# Altium PCB mom-s.PcbDoc (part 2 of 2)
Units mm, origin at the board's own origin, x right, y up, seen from the top; angles counter-clockwise.
Board outline 16 x 18 mm, 4 copper layers (Top Layer, GND, PWR, Bottom Layer), stack 0.774 mm thick; 61 components, 60 nets, 227 pads, 0 vias.
Unrouted connection lines stored in the file: 160.
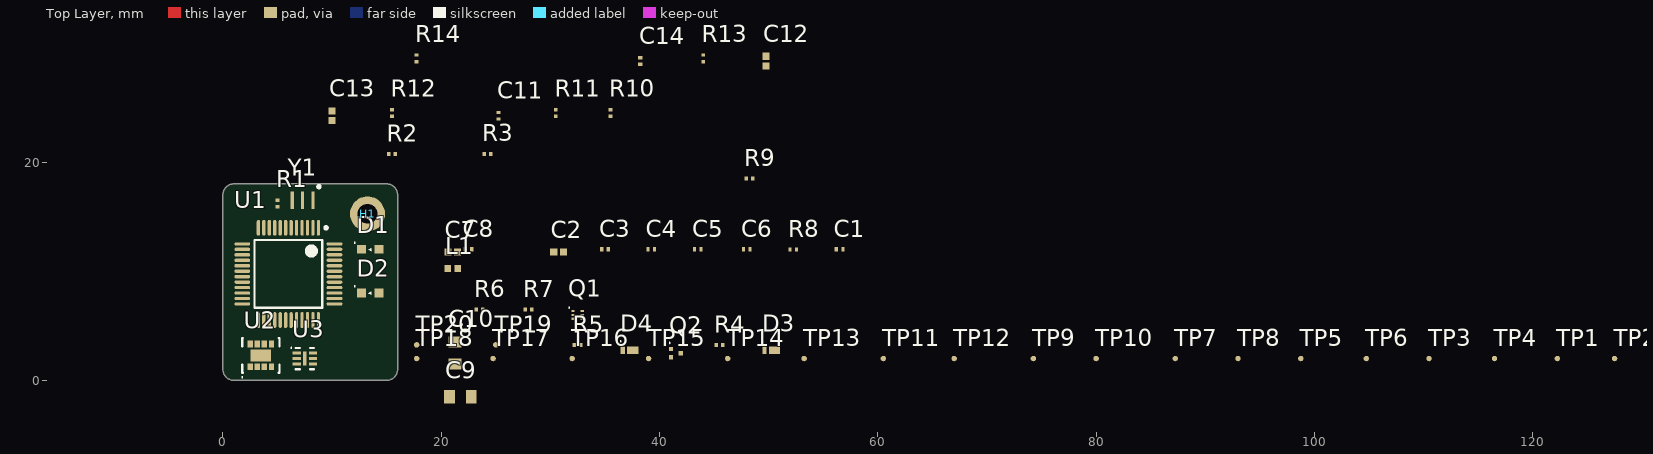
[diagram p0: Top Layer view]

## Nets (pads, with @x,y where several pads share a name; then routed paths per layer and width w, separated by ;. In a path a pad name is that pad's centre, name@x,y a point inside that pad or via, vN(x,y) a via of type N, cw(c..) or ccw(c..) an arc to the next point about the centre after c; other vN are vias at no path point) (continued)
MCU_BOOT0: R6.1 R8.2 U1.44
MCU_IO0: J1.33 TP12.1 U1.10
MCU_IO1: J1.34 TP13.1 U1.11
MCU_IO2: J1.35 TP14.1 U1.12
MCU_IO3: J1.36 TP15.1 U1.13
MCU_IO4: J1.37 TP16.1 U1.14
MCU_IO5: J1.38 U1.15
MCU_IO6: J1.39 U1.16
MCU_IO7: J1.40 U1.17
MCU_IO8: J1.41 U1.29
MCU_IO9: J1.42 U1.30
MCU_IO10: J1.43 U1.31
MCU_IO11: J1.44 U1.38
MCU_IO12: J1.45 U1.18
MCU_IO13: J1.46 U1.19
MCU_IO14: J1.47 U1.20
MCU_IO15: J1.48 U1.39
MCU_IO16: J1.49 U1.40
MCU_IO17: J1.50 U1.41
MCU_IO18: J1.51 U1.42
MCU_IO19: J1.52 U1.43
MCU_IO20: J1.53 U1.45
MCU_IO21: J1.54 U1.46
MCU_IO22: J1.55 U1.21
MCU_IO23: J1.56 U1.22
MCU_IO24: J1.57 U1.25
MCU_IO25: J1.58 U1.26
MCU_IO26: J1.59 U1.27
MCU_IO27: TP17.1 U1.3
MCU_IO28: TP18.1 U1.4
MCU_NRST: C1.2 J1.24 R7.1 TP2.1 U1.7
MCU_SWCLK: J1.23 TP4.1 U1.37
MCU_SWDIO: J1.25 TP6.1 U1.34
MCU_USB_D_N: J1.30 TP10.1 U1.32
MCU_USB_D_P: J1.29 TP8.1 U1.33
NetD1_1: D1.1 R2.2
NetD2_1: D2.1 R3.2
NetH1_1: H1.1 R14.2
NetQ1_3: Q1.3 R3.1
NetQ1_6: Q1.6 R2.1
NetR1_2: R1.2 Y1.3
PG: R9.1 U2.7
SS: C11.2 U2.8
USER_LED0: Q1.2 U1.28
USER_LED1: Q1.5 U1.2
VDDA: C7.2 C8.2 L1.2 U1.9
XI: U1.5 Y1.1
XO: R1.1 U1.6
pads on no net: U3.5

## Polygon pours and split planes (outlines as drawn)
no net on GND (split plane): 15.096,17.482 15.188,17.454 15.273,17.409 15.348,17.348 15.409,17.273 15.454,17.188 15.482,17.096 15.491,17.012 15.49,17 15.49,1 15.491,0.988 15.482,0.904 15.454,0.812 15.409,0.727 15.348,0.652 15.273,0.591 15.188,0.546 15.096,0.518 15.012,0.509 15,0.51 1,0.51 0.988,0.509 0.904,0.518 0.812,0.546 0.727,0.591 0.652,0.652 0.591,0.727 0.546,0.812 0.518,0.904 0.509,0.988 0.51,1 0.51,17 0.509,17.012 0.518,17.096 0.546,17.188 0.591,17.273 0.652,17.348 0.727,17.409 0.812,17.454 0.904,17.482 0.988,17.491 1,17.49 15,17.49 15.012,17.491
no net on PWR (split plane): 15.096,17.482 15.188,17.454 15.273,17.409 15.348,17.348 15.409,17.273 15.454,17.188 15.482,17.096 15.491,17.012 15.49,17 15.49,1 15.491,0.988 15.482,0.904 15.454,0.812 15.409,0.727 15.348,0.652 15.273,0.591 15.188,0.546 15.096,0.518 15.012,0.509 15,0.51 1,0.51 0.988,0.509 0.904,0.518 0.812,0.546 0.727,0.591 0.652,0.652 0.591,0.727 0.546,0.812 0.518,0.904 0.509,0.988 0.51,1 0.51,17 0.509,17.012 0.518,17.096 0.546,17.188 0.591,17.273 0.652,17.348 0.727,17.409 0.812,17.454 0.904,17.482 0.988,17.491 1,17.49 15,17.49 15.012,17.491

## Text inside footprints (layer, text, board x,y; h text height)
J1: Bottom Overlay "1" at -14.395,2.35 h0.5 r270; Bottom Overlay "2" at -9.895,2.25 h0.5 r270; Bottom Overlay "59" at -14.395,13.65 h0.5 r270; Bottom Overlay "60" at -9.895,13.65 h0.5 r270